# Altium PCB SHDN-IMD-S00-V00-IMDDaughter.PcbDoc
Units mm, origin at the board's own origin, x right, y up, seen from the top; angles counter-clockwise.
Board outline 55.68 x 59.75 mm, 2 copper layers (Top Layer, Bottom Layer); 75 components, 43 nets, 244 pads, 28 vias.
Unrouted connection lines stored in the file: 2.
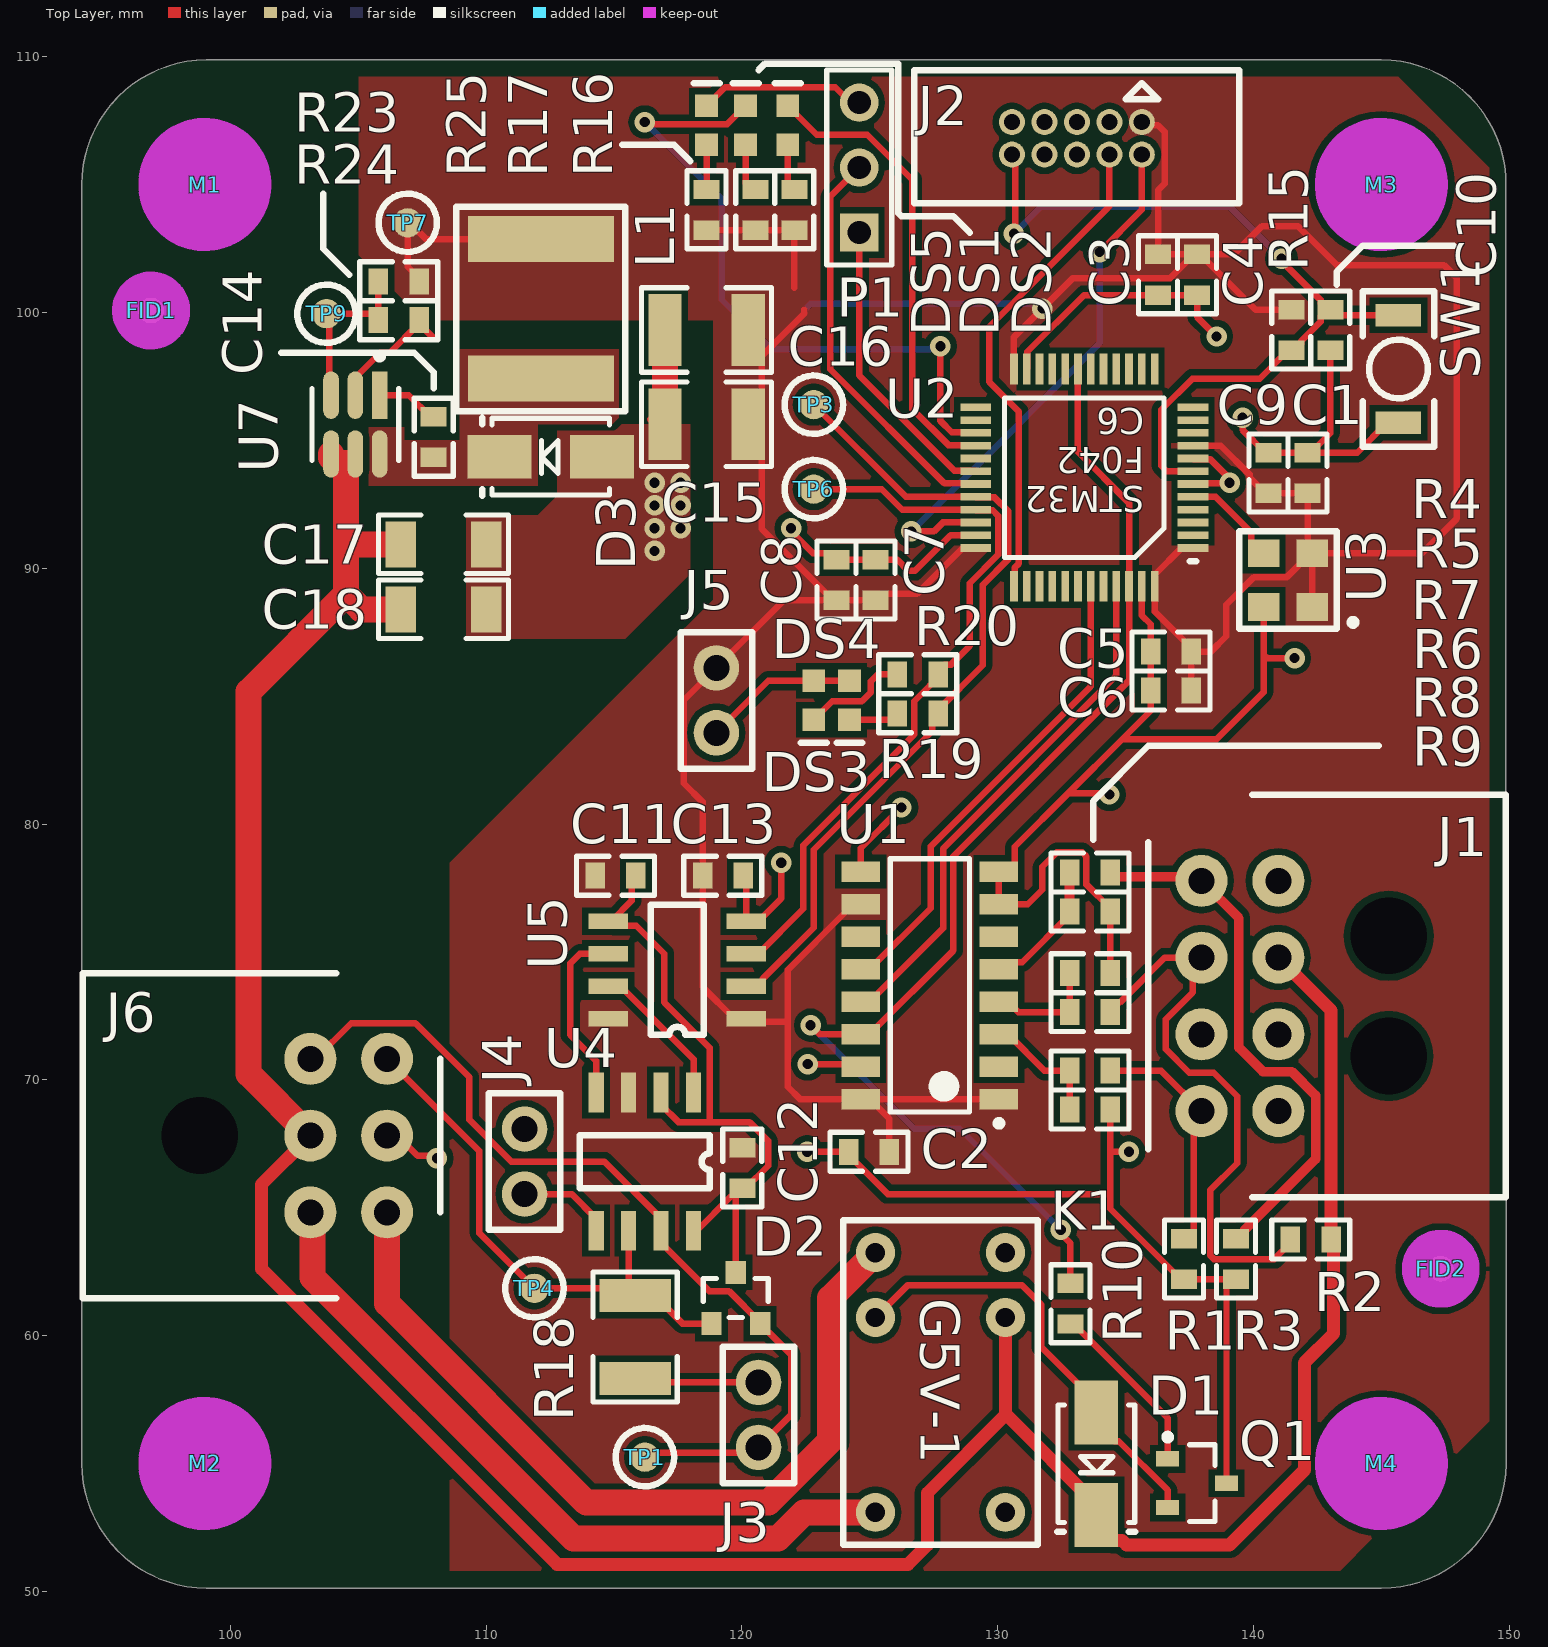
[diagram p0: Top Layer view]
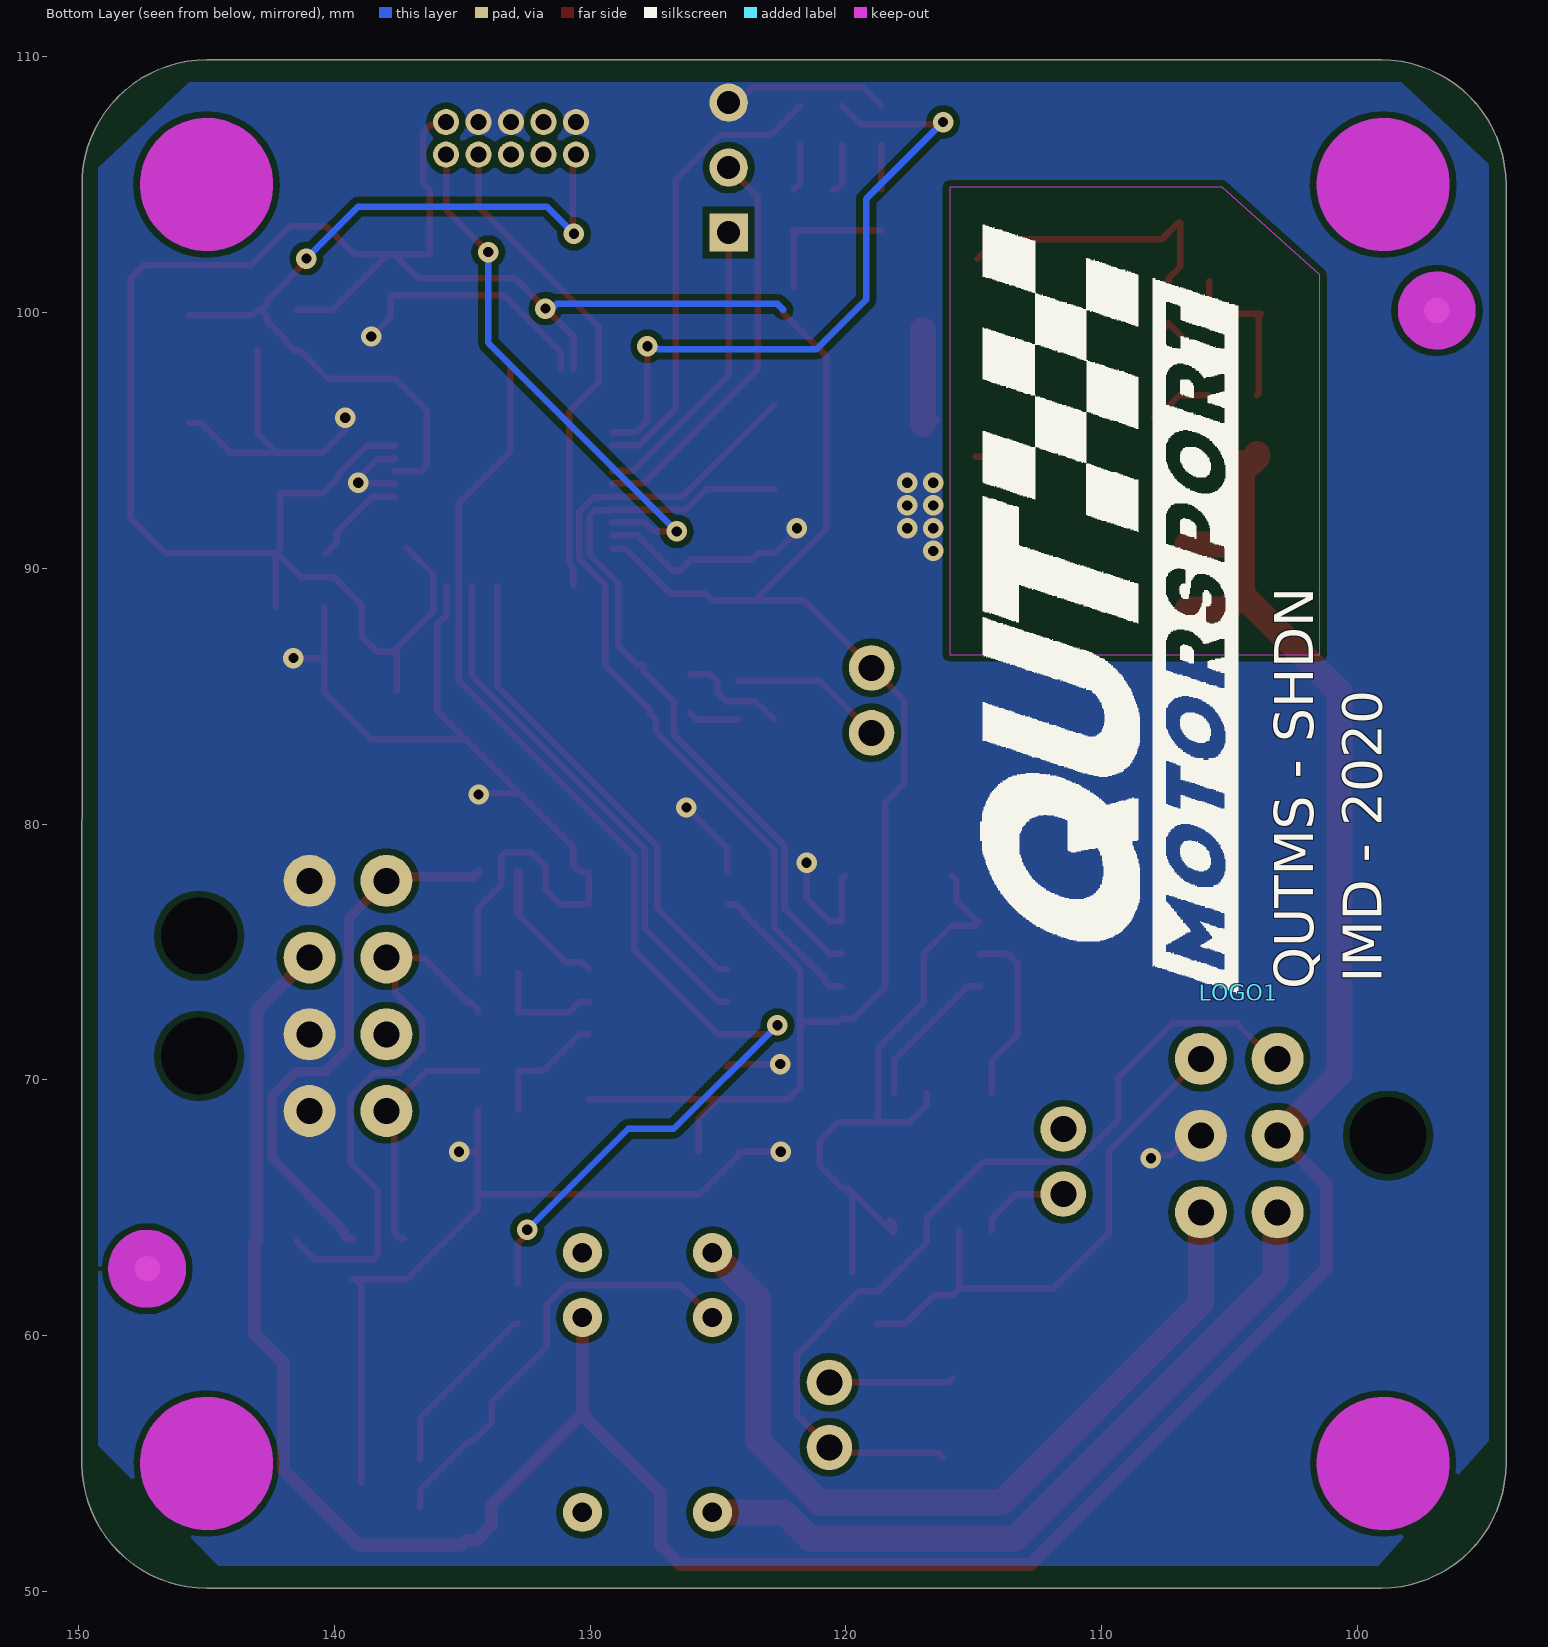
[diagram p1: Bottom Layer view, seen from below]
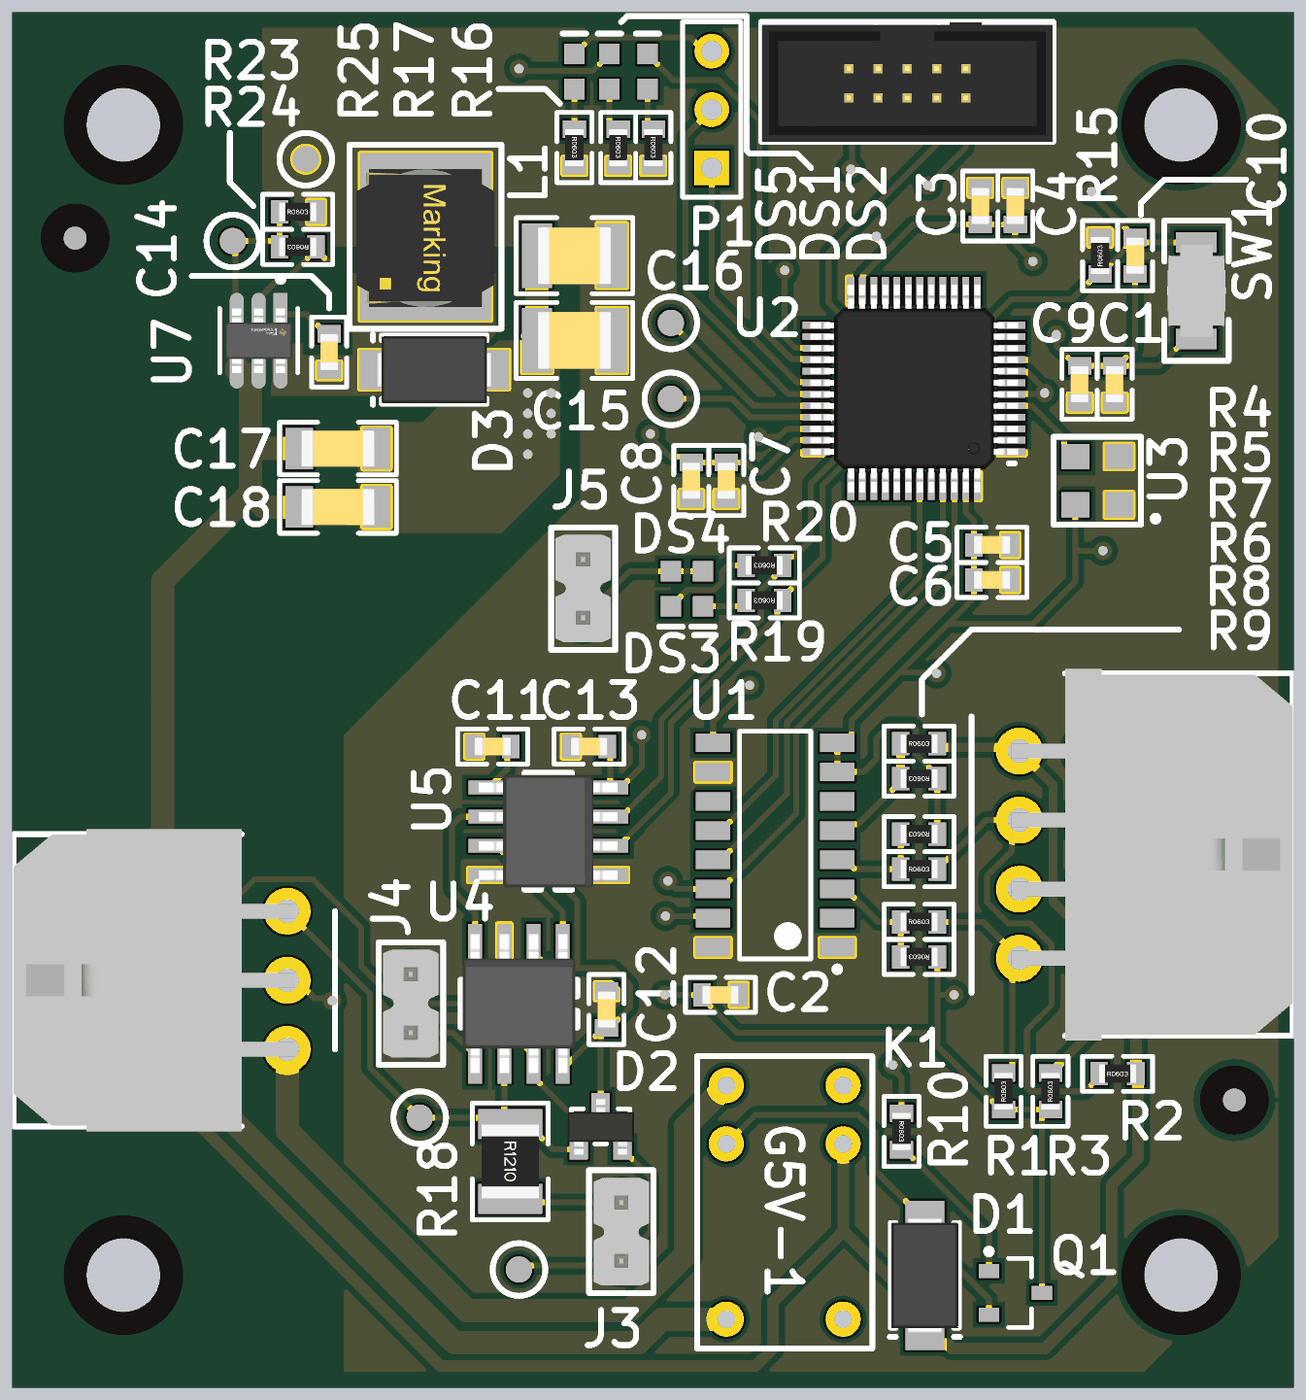
[diagram p2: 3D render of the assembled board from above, using the file's embedded part models]

## Layer stack, top to bottom
Top Solder: solder mask 0.0102, Solder Resist, Dk 3.5
Top Layer: signal copper 0.0356
Dielectric 1: dielectric 0.32, FR-4, Dk 4.8
Bottom Layer: signal copper 0.0356
Bottom Solder: solder mask 0.0102, Solder Resist, Dk 3.5

## Board outline
99.06,50.127 99.062,50.127 ccw(c99.069,55) 99.069,50.127 99.062,50.127 cw(c99.069,55) 94.196,55 94.196,105 cw(c99.069,105) 99.06,109.873 cw(c99.069,105) 99.069,109.873 ccw(c99.069,110) 99.07,109.873 145,109.873 ccw(c145,110) 145,109.873 cw(c145,105) 149.86,105.354 149.873,54.971 cw(c145,55) 145.001,50.127 cw(c145,55) 145,50.127 145.001,50.127

## Design rules (kind name [scope] priority, off if disabled: settings)
Clearance [All] p1: gap=0.254 ignorepadtopadclearanceinfootprint=FALSE except(0: Arc-Hole Track-Hole SMDPad-Hole THPad-Hole Via-Hole Fill-Hole Poly-Hole Region-Hole Text-Hole; 0.152: Arc-Arc Arc-Track Arc-SMDPad Track-Track Track-SMDPad SMDPad-SMDPad)
PolygonConnect [All] p1: connectstyle=Direct reliefconductorwidth=0.254 reliefentries=4 polygonreliefangle="90 Angle" airgapwidth=0.254
RoutingVias [All] p1: holewidth=0.4 width=0.8 viastyle="Through Hole" minholewidth=0.4 minwidth=0.8 maxholewidth=0.4 maxwidth=0.8
SolderMaskExpansion [All] p1: expansion=0.102 istentingtop=FALSE
Width [All] p1: maxlimit=1.016 minlimit=0.254 preferedwidth=0.508 minimp=50.000000 maximp=50.000000 favimp=50.000000
30 further rules are at their usual default settings.

## Classes and differential pairs
component class SHUTDOWN: D1 K1 Q1 R10
component class SHDN-IMD-S01-V00-IMDDaughter: FID1 FID2 J6 LOGO1 M1 M2 M3 M4
component class "POWER SUPPLY": C14 C15 C16 C17 D3 DS5 L1 R23 R24 R25 TP7 TP9 U7
component class MICROCONTROLLER: C3 C4 C5 C6 C7 C8 C9 C10 DS1 DS2 J2 P1 R15 R16 R17 SW1 U2 U3
component class IMD: C1 C2 J1 R1 R2 R3 R4 R5 R6 R7 R8 R9 U1
component class CANBUS: C11 C12 C13 D2 DS3 DS4 J3 J4 J5 R18 R19 R20 TP1 TP3 TP4 TP6 U4 U5

## Components (designator, comment, footprint, x,y, rotation, side; value= is the part's Value field where it differs from the comment)
C1 "100nF" Cap_Ceramic_0603 142.113,93.726 r270 top
C2 "100nF" Cap_Ceramic_0603 124.968,67.183 r0 top
C3 "100nF" Cap_Ceramic_0603 136.271,101.473 r90 top
C4 "4u7" Cap_Ceramic_0603 137.795,101.473 r90 top
C5 "100nF" Cap_Ceramic_0603 136.779,86.741 r0 top
C6 "4u7" Cap_Ceramic_0603 136.779,85.217 r0 top
C7 "100nF" Cap_Ceramic_0603 125.222,89.535 r270 top
C8 "4u7" Cap_Ceramic_0603 123.698,89.535 r270 top
C9 "100nF" Cap_Ceramic_0603 140.589,93.726 r270 top
C10 "100nF" Cap_Ceramic_0603 143.002,99.314 r90 top
C11 "100nF" Cap_Ceramic_0603 115.062,77.978 r0 top
C12 "100nF" Cap_Ceramic_0603 120.015,66.548 r90 top
C13 "100nF" Cap_Ceramic_0603 119.253,77.978 r180 top
C14 "100nF 100V 5% X7R 0603" Cap_Ceramic_0603 107.95,95.123 r270 top
C15 "47uF 16V 1210" Cap_Ceramic_1210 118.618,95.631 r0 top
C16 "47uF 16V 1210" Cap_Ceramic_1210 118.618,99.314 r0 top
C17 "22uF 35V 1206" Cap_Ceramic_1206 108.331,90.932 r180 top
C18 "22uF 35V 1206" Cap_Ceramic_1206 108.331,88.392 r180 top
D1 "1N4448WQ-7-F" SMA 133.858,54.991 r270 top
D2 "NUP2105L" NUP2105L 119.761,61.468 r0 top
D3 "B260A-13-F" SMA 112.522,94.361 r180 top
DS1 "LED Orange" "LED ORANGE 0603" 120.142,107.315 r90 top
DS2 "LED Orange" "LED ORANGE 0603" 121.793,107.315 r90 top
DS3 "LED Blue 0603" "LED BLUE 0603" 124.206,84.836 r270 top
DS4 "LED Blue 0603" "LED BLUE 0603" 122.809,84.836 r270 top
DS5 "LED Green 0603" "LED GREEN 0603" 118.618,107.315 r90 top
FID1 "Fiducial 1MM" "FIDUCIAL 1MM" 96.901,100.076 r0 top
FID2 "Fiducial 1MM" "FIDUCIAL 1MM" 147.32,62.611 r90 top
J1 "Microfit 3.0 2x4" Microfit_2X4_R_TH 145.288,73.279 r90 top
J2 "IDC 10P 2x5 1.27mm" "IDC 1.27MM 10P" 133.096,106.807 r180 top
J3 "Jumper 2Way Pins" Jumper_2Way_Pin 120.65,58.166 r90 top
J4 "Jumper 2Way Pins" Jumper_2Way_Pin 111.506,65.532 r270 top
J5 "Jumper 2Way Pins" Jumper_2Way_Pin 118.999,83.566 r270 top
J6 "Microfit 3.0 2x3" Microfit_2X3_R_TH 98.806,67.818 r270 top
K1 "G5V-1-DC12" G5V-1 127.762,58.166 r270 top
L1 "74404064221" Inductor_6x6mm 112.141,100.076 r90 top
LOGO1 "30mm Wide QUTMS Logo" "QUTMS LOGO 30MM" 104.648,73.406 r90 bottom
M1 "Hole M3 Tight Unplated" "M3.2 UNPLATED" 99,105 r0 top
M2 "Hole M3 Tight Unplated" "M3.2 UNPLATED" 99,55 r0 top
M3 "Hole M3 Tight Unplated" "M3.2 UNPLATED" 145,105 r0 top
M4 "Hole M3 Tight Unplated" "M3.2 UNPLATED" 145,55 r0 top
P1 "UART" HDR1X3 124.587,103.124 r90 top
Q1 "" PMV15UNEAR 137.795,54.229 r0 top
R1 "2k2" Res_ThinFilm_0603 137.287,62.992 r90 top
R2 "2k2" Res_ThinFilm_0603 142.24,63.754 r0 top
R3 "2k2" Res_ThinFilm_0603 139.319,62.992 r90 top
R4 "10k" Res_ThinFilm_0603 133.604,78.105 r0 top
R5 "3k9" Res_ThinFilm_0603 133.604,76.581 r180 top
R6 "10k" Res_ThinFilm_0603 133.604,72.644 r0 top
R7 "3k9" Res_ThinFilm_0603 133.604,74.168 r180 top
R8 "10k" Res_ThinFilm_0603 133.604,70.358 r0 top
R9 "3k9" Res_ThinFilm_0603 133.604,68.834 r180 top
R10 "1K" Res_ThinFilm_0603 132.842,61.245 r270 top
R15 "4k7" Res_ThinFilm_0603 141.478,99.314 r90 top
R16 "330R" Res_ThinFilm_0603 120.523,104.013 r270 top
R17 "330R" Res_ThinFilm_0603 122.047,104.013 r270 top
R18 "120R 1% 1210" Res_ThinFilm_1210 115.824,59.944 r270 top
R19 "330R" Res_ThinFilm_0603 126.873,84.328 r180 top
R20 "330R" Res_ThinFilm_0603 126.873,85.852 r180 top
R23 "64k9 1%" Res_ThinFilm_0603 106.584,101.219 r0 top
R24 "19k6 1%" Res_ThinFilm_0603 106.584,99.695 r180 top
R25 "1k 5% 0603" Res_ThinFilm_0603 118.618,104.013 r270 top
SW1 "B3U-1000P" "BTN B3U-1000P" 145.669,97.79 r90 top
TP1 "TestPoint_SMD" TestPointSMD 116.205,55.245 r90 top
TP3 "TestPoint_SMD" TestPointSMD 122.809,96.393 r90 top
TP4 "TestPoint_SMD" TestPointSMD 111.887,61.849 r90 top
TP6 "TestPoint_SMD" TestPointSMD 122.809,93.091 r90 top
TP7 "TestPoint_SMD" TestPointSMD 106.934,103.505 r90 top
TP9 "TestPoint_SMD" TestPointSMD 103.759,99.949 r90 top
U1 "SI8640BB-B-IS1R" SI8640BB-B-IS1R 127.348,73.691 r180 top
U2 "STM32F042C6" STM32F042C6 137.636,90.79 r180 top
U3 "DSC1001DI1-008.0000T" DSC1001DI1-008.0000TCT-ND 141.351,89.535 r180 top
U4 "SN65HVD233" SN65HVD233DR 116.205,66.802 r270 top
U5 "Si8621BC-B-IS" Si8621BC-B-IS 117.475,74.295 r180 top
U7 "LMR14010" LMR14010 104.902,95.631 r270 top

## Footprints (in the part's own frame and the unit in brackets; to place one, negate y for a bottom-side part, rotate by r counter-clockwise, add the part's x,y. Pads: shape width x height; smd on the part's side, far side on the other; paste and mask are expansions set on the pad)
"BTN B3U-1000P" [mil] "OMRON B3U-1000P"
  rect 35x70 smd: 1(-82.68,0) 2(82.68,0)
  silkscreen extent -120,-55 120,55, body extent -79,-49 79,49, height 63
Cap_Ceramic_0603 [mil]
  rect 30x40 smd: 1(-31.24,0) 2(31.24,0)
  silkscreen extent -60,-30 60,30, body extent -31,-16 32,16, height 33
Cap_Ceramic_1206 [mil]
  rect 47x71 smd: 1(-66.08,0) 2(66.08,0)
  silkscreen extent -100,-45 100,45, body extent -63,-31 63,32, height 53
Cap_Ceramic_1210 [mm]
  rect 1.3x2.8 smd: 1(-1.625,0) 2(1.625,0)
  silkscreen extent -2.54,-1.65 2.54,1.65, body extent -1.6,-1.25 1.6,1.25, height 1.35
DSC1001DI1-008.0000TCT-ND [mm]
  rect 1.219x1.092 smd: 1(-0.95,1.05) 2(0.95,1.05) 3(0.95,-1.05) 4(-0.95,-1.05)
  silkscreen extent -2.67,-1.91 1.91,1.91, body extent -1.25,-1.6 1.25,1.6, height 0.85
"FIDUCIAL 1MM" [mm]
  round 1 smd mask+1: 1(0,0)
  round 1 smd far side mask+1: 1(0,0)
  Keep-Out Layer circle w1.524: c0,0 r0.762
G5V-1 [mil]
  round 60 hole 30: 1(-200,100) 2(-100,100) 5(200,100) 6(200,-100) 9(-100,-100) 10(-200,-100)
  silkscreen extent -250,-150 250,150, body extent -242,-148 250,148, height 394
HDR1X3 [mm] "Connector; Header; 3 Position"
  rect 1.5x1.5 hole 0.9: 1(0,0)
  round 1.5 hole 0.9: 2(2.54,0) 3(5.08,0)
  silkscreen extent -1.27,-1.27 6.35,1.27
"IDC 1.27MM 10P" [mil]
  round 40 hole 25: 1(-100,-25) 2(-100,25) 3(-50,-25) 4(-50,25) 5(0,-25) 6(0,25) 7(50,-25) 8(50,25) 9(100,-25) 10(100,25)
  silkscreen extent -250,-105 250,100, body extent -249,-104 249,100, height 214
Inductor_6x6mm [mm]
  rect 1.8x5.7 smd: 1(-2.667,0) 2(2.794,0)
  silkscreen extent -3.94,-3.3 4.06,3.3, body extent -3,-3 3,3, height 4.56
Jumper_2Way_Pin [mil]
  round 70 hole 40: 1(-100,0) 2(0,0)
  silkscreen extent -155,-55 55,55, body extent -142,-48 42,47, height 332
"LED BLUE 0603" [mil]
  rect 35x35 smd: 1(-30,0) 2(30,0)
  silkscreen extent 65,-20 65,20, body extent -40,-20 40,20, height 30
"LED GREEN 0603" [mil]
  rect 35x35 smd: 1(-30,0) 2(30,0)
  silkscreen extent 65,-20 65,20, body extent -40,-20 40,20, height 30
"LED ORANGE 0603" [mil]
  rect 35x35 smd: 1(-30,0) 2(30,0)
  silkscreen extent 65,-20 65,20, body extent -40,-20 40,20, height 30
LMR14010 [mm]
  rect 1.854x0.612 smd paste+0 mask+0: 1(-1.136,0.933)
  rrect100% 1.854x0.612 smd paste+0 mask+0: 2(-1.136,-0.017) 3(-1.136,-0.967) 4(1.164,-0.967) 5(1.164,-0.017) 6(1.164,0.933)
  silkscreen extent -2.79,-1.72 1.41,1.68, body extent -2.56,-1.97 2.59,1.93, height 0.25
"M3.2 UNPLATED" [mm]
  round 0 hole 3.2 unplated mask+2.6: 1(0,0)
  Keep-Out Layer circle w2.667: c0,0 r1.27
Microfit_2X3_R_TH [mil]
  round 80 hole 40: 1(118.11,170) 2(0,170) 3(-118.11,170) 4(118.11,288.19) 5(0,288.19) 6(-118.11,288.19)
  round 0 hole 118.11 mask+10: NC(0,0)
  silkscreen extent -250,-180 250,370, body extent -259,-180 259,302, height 350
Microfit_2X4_R_TH [mil]
  round 80 hole 40: 1(177.17,170) 2(59.06,170) 3(-59.06,170) 4(-177.17,170) 5(177.17,288.19) 6(59.06,288.19) 7(-59.06,288.19) 8(-177.17,288.19)
  round 0 hole 118.11 mask+10: NC(-92.52,0) NC(92.52,0)
  silkscreen extent -310,-180 310,370, body extent -318,-180 318,302, height 350
NUP2105L [mm]
  rect 0.8x0.9 smd: 1(-0.95,-1) 2(0.95,-1) 3(0,1)
  silkscreen extent -1.27,-0.76 1.27,0.76, body extent -1.45,-1.22 1.45,1.18, height 1
PMV15UNEAR [mm] "SOT23, 3-Leads, Body 2.90x2.30mm, Pitch 0.95mm, IPC Medium Density"
  rect 0.9x0.6 smd: D(1.15,0) G(-1.15,0.95) S(-1.15,-0.95)
  silkscreen extent -1.27,-1.5 0.7,1.92, body extent -0.7,-1.5 0.7,1.5, height 1.1
"QUTMS LOGO 30MM" [mm]
  silkscreen extent -0.03,0.03 30.02,10.1
Res_ThinFilm_0603 [mil]
  rect 30x40 smd: 1(-31.24,0) 2(31.24,0)
  silkscreen extent -60,-30 60,30, body extent -31,-16 32,16, height 18
Res_ThinFilm_1210 [mm]
  rect 1.3x2.8 smd: 1(-1.625,0) 2(1.625,0)
  silkscreen extent -2.54,-1.65 2.54,1.65, body extent -1.6,-1.25 1.6,1.25, height 0.6
Si8621BC-B-IS [mm]
  rect 1.55x0.6 smd: 1(-2.7,1.905) 2(-2.7,0.635) 3(-2.7,-0.635) 4(-2.7,-1.905) 5(2.7,-1.905) 6(2.7,-0.635) 7(2.7,0.635) 8(2.7,1.905)
  silkscreen extent -1.04,-2.54 1.04,2.54, body extent -3.01,-2.45 3.01,2.45, height 1.63
SI8640BB-B-IS1R [mm] "SOIC, 16-Leads, Body 9.90x3.90mm, Pitch 1.27mm, IPC Medium Density"
  rect 1.5x0.8 smd: 1(-2.7,4.445) 2(-2.7,3.175) 3(-2.7,1.905) 4(-2.7,0.635) 5(-2.7,-0.635) 6(-2.7,-1.905) 7(-2.7,-3.175) 8(-2.7,-4.445) 9(2.7,-4.445) 10(2.7,-3.175) 11(2.7,-1.905) 12(2.7,-0.635) 13(2.7,0.635) 14(2.7,1.905) 15(2.7,3.175) 16(2.7,4.445)
  silkscreen extent -2.83,-4.95 1.55,5.52, body extent -1.95,-4.95 1.95,4.95, height 1.75
SMA [mm]
  rect 2.5x1.7 smd: A(-2,0) K(2,0)
  silkscreen extent -2.3,-1.52 2.67,1.52, body extent -2.52,-1.46 2.52,1.46, height 2.4
SN65HVD233DR [mm]
  rect 1.55x0.6 smd: 1(-2.7,1.903) 2(-2.7,0.633) 3(-2.7,-0.637) 4(-2.7,-1.907) 5(2.7,-1.907) 6(2.7,-0.637) 7(2.7,0.633) 8(2.7,1.903)
  silkscreen extent -1.04,-2.54 1.04,2.54, body extent -3.01,-2.45 3.01,2.45, height 1.63
STM32F042C6 [mm]
  rect 1.2x0.3 smd: 1(0,0) 2(0,-0.5) 3(0,-1) 4(0,-1.5) 5(0,-2) 6(0,-2.5) 7(0,-3) 8(0,-3.5) 9(0,-4) 10(0,-4.5) 11(0,-5) 12(0,-5.5) 25(8.5,-5.5) 26(8.5,-5) 27(8.5,-4.5) 28(8.5,-4) 29(8.5,-3.5) 30(8.5,-3) 31(8.5,-2.5) 32(8.5,-2) 33(8.5,-1.5) 34(8.5,-1) 35(8.5,-0.5) 36(8.5,0)
  rect 0.3x1.2 smd: 13(1.5,-7) 14(2,-7) 15(2.5,-7) 16(3,-7) 17(3.5,-7) 18(4,-7) 19(4.5,-7) 20(5,-7) 21(5.5,-7) 22(6,-7) 23(6.5,-7) 24(7,-7) 37(7,1.5) 38(6.5,1.5) 39(6,1.5) 40(5.5,1.5) 41(5,1.5) 42(4.5,1.5) 43(4,1.5) 44(3.5,1.5) 45(3,1.5) 46(2.5,1.5) 47(2,1.5) 48(1.5,1.5)
  silkscreen extent -0.13,-5.86 7.36,0.51, body extent -0.27,-7.26 8.76,1.77, height 1.5
TestPointSMD [mil]
  round 45 smd: 1(0,0)
  silkscreen extent -45,-45 45,45

## Part data
C1 C2 C9 C10: library part "100nF 50V 5% X7R 0603", "Capacitor, Ceramic, SMD, 100nF, 50V, 5%, X7R, 0603"
C3 C5 C7 C11 C12 C13: library part "100nF 100V 5% X7R 0603", "Capacitor, Ceramic, SMD, 100nF, 100V, 5%, X7R, 0603"
C4 C6 C8: library part "4u7 50V 5% X7R 0603", "Capacitor, Ceramic, SMD, 4u7, 50V, 5%, X7R, 0603"
C14: "Capacitor, Ceramic, SMD, 100nF, 100V, 5%, X7R, 0603"
C15 C16: library part "47uF 16V 10% X7R 1210", "Capacitor, Ceramic, SMD, 47uF, 16V, 5%, X7R, 1210"
C17 C18: library part "22uF 35V 10% X7R 1206", "Capacitor, Ceramic, SMD, 22uF, 35V, 10%, X7R, 1206"
D1: "Diode, SMD, 75V, 5%, 250mA, SOD123", Average Rectified Current=150mA, Forward Voltage=1V, Manufacturer="ON Semiconductor / Fairchild", Manufacturer Part Number=1N914BWS, Max Forward Surge Current (Ifsm)=4A, Max Operating Temperature=150°C, Max Repetitive Reverse Voltage (Vrrm)=75V, Max Reverse Leakage Current=5uA, Min Operating Temperature=-55°C, Package Quantity=1, Power Dissipation=200mW, Category="Rectifier Diodes", Contact Plating=Tin,Matte, Element Configuration=Single, Forward Current=150mA, Height=1mm, Lead Free="Lead Free", Length=1.8mm, Max Reverse Voltage (DC)=75V, Mount="Surface Mount", Number of Pins=2, Packaging="Tape and Reel", Peak Reverse Current=5uA, Radiation Hardening=No, REACH SVHC="No SVHC", Recovery Time=4ns, Reverse Recovery Time=4ns, Reverse Voltage=75V, Weight=0.0276g, Width=1.35mm
D3: "Diode, Schottky Barrier Rectifier, 60 V, 2 A, B260A-13-F"
DS1 DS2: library part "LED ORANGE 0603"
DS3 DS4: library part "LED BLUE 0603"
J1: library part Microfit_2x4
J3 J4 J5: library part "Jumper 2Way Side Pins", "Jumper 2Way Side Pins"
J6: library part Microfit_2x3
K1: "General Purpose Relay SPDT (1 Form C) Through Hole, 12V, 2A"
L1: "FIXED IND 220UH 660MA 850 MOHM", ComponentLink1Description=Digikey, ComponentLink1URL=https://www.digikey.com.au/product-detail/en/w%C3%BCrth-elektronik/74404064221/732-7261-1-ND/5353241, ComponentLink2Description="LCSC A", ComponentLink2URL=https://lcsc.com/product-detail/Power-Inductors_Sunlord-SWPA6045S221MT_C91047.html, ComponentLink3Description="LCSC B", ComponentLink3URL=https://lcsc.com/product-detail/Power-Inductors_SXN-Shun-Xiang-Nuo-Elec-SMNR6045-221MT_C467145.html
LOGO1: library part "QUTMS Logo 30mm"
M1 M2 M3 M4: "M3.2 Hole, No Plating"
P1: library part "Header 3", "Header, 3-Pin", LatestRevisionDate=17-Jul-2002, LatestRevisionNote="Re-released for DXP Platform.", Publisher="Altium Limited"
Q1: library part PMV15UNEAR, "MOSFET N-CH, 20V, SOT23", Manufacturer=Nexperia
R1 R2 R3: library part "2k2 5% 0603", "Resistor, SMD, 2k2, 0.1W, 5%, 0603"
R4 R6 R8: library part "10k 1% 0603", "Resistor, SMD, 10k, 0.1W, 1%, 0603"
R5 R7 R9: library part "3k9 5% 0603", "Resistor, SMD, 3k9, 0.1W, 5%, 0603"
R10: library part "1k 5% 0603", "Resistor, SMD, 1k, 0.1W, 5%, 0603"
R15: library part "4k7 5% 0603", "Resistor, SMD, 4k7, 0.1W, 5%, 0603"
R16 R17 R19 R20: library part "330R 5% 0603", "Resistor, SMD, 330R, 0.1W, 5%, 0603"
R18: "Resistor, SMD, 120R, 0.25W, 1%, 1210"
R23: library part "64k9 1% 0603", "Resistor, SMD, 64k9, 0.1W, 5%, 0603"
R24: library part "19k6 1% 0603", "Resistor, SMD, 19k6, 0.1W, 5%, 0603"
R25: "Resistor, SMD, 1k, 0.1W, 5%, 0603"
SW1: library part "BTN B3U-1000P", "Omron B3U-1000P Ultra Miniture Switch", ComponentLink1Description=LCSC, ComponentLink1URL=https://lcsc.com/product-detail/Tactile-Switches_BRIGHT-TSA063G50-250_C294565.html
U2: library part STM32042C6, "ARM® Cortex®-M0 STM32F0 Microcontroller IC 32-Bit 48MHz 32KB (32K x 8) FLASH 48-LQFP (7x7)", ComponentLink1Description=Digikey, ComponentLink1URL=https://www.digikey.com.au/product-detail/en/stmicroelectronics/STM32F042C6T6TR/497-19319-1-ND/10063344, ComponentLink2Description=Datasheet, ComponentLink2URL=https://www.st.com/resource/en/datasheet/stm32f042k6.pdf
U3: "on 8MHz XO (Standard) CMOS Oscillator 1.8 ~ 3.3V Standby (Power Down) 4-SMD, No Lead"
D2: ComponentLink1Description=Datasheet, ComponentLink1URL=https://www.onsemi.cn/PowerSolutions/document/NUP2105L-D.PDF, ComponentLink2Description=LCSC, ComponentLink2URL=https://lcsc.com/product-detail/TVS_ON-Semiconductor-NUP2105LT1G_C14486.html, ComponentLink3Description=Digikey, ComponentLink3URL=https://www.digikey.com.au/product-detail/en/on-semiconductor/SZNUP2105LT1G/SZNUP2105LT1GOSCT-ND/3487669
U1 U5: ComponentLink1Description=Digikey, ComponentLink1URL=https://www.digikey.com.au/product-detail/en/silicon-labs/SI8621BC-B-ISR/336-4774-1-ND/8611005, ComponentLink2Description=Datasheet, ComponentLink2URL=https://www.silabs.com/documents/public/data-sheets/si861x-2x-datasheet.pdf
U4: ComponentLink1Description=LCSC, ComponentLink1URL=https://lcsc.com/product-detail/CAN-ICs_Texas-Instruments_SN65HVD233DRG4_Texas-Instruments-Texas-Instruments-SN65HVD233DRG4_C61643.html, ComponentLink2Description=Digikey, ComponentLink2URL=https://www.digikey.com.au/product-detail/en/texas-instruments/SN65HVD233DR/296-35967-1-ND/4134960, ComponentLink3Description=Datasheet, ComponentLink3URL=https://www.ti.com/lit/ds/symlink/sn65hvd233.pdf?ts=1588560888178, ComponentLink4Description="Ti Product Page", ComponentLink4URL=https://www.ti.com/product/SN65HVD233

## Via types
v1: diameter 0.8, hole 0.4, Top Layer to Bottom Layer, tented both sides, 28 vias

## Nets (pads, with @x,y where several pads share a name; then routed paths per layer and width w, separated by ;. In a path a pad name is that pad's centre, name@x,y a point inside that pad or via, vN(x,y) a via of type N, cw(c..) or ccw(c..) an arc to the next point about the centre after c; other vN are vias at no path point)
3V3: C1.2 C2.2 C3.2 C4.2 C5.2 C6.2 C7.2 C8.2 C9.2 C11.1 C12.2 C13.2 C15.2 C16.2 J2.1 J5.1 L1.2 R15.2 R16.2 R17.2 R23.2 R25.2 TP7.1 U1.1 U1.10 U1.16 U2.1 U2.9 U2.24 U2.36 U2.48 U3.1 U3.4 U4.3 U5.1 U5.8 | length 160.1
  Top Layer w0.254: R23.2 107.378,101.346 106.934,101.79 TP7.1 107.011,103.505 107.646,102.87 L1.2 114.091,102.87 L1.2@114.864,102.097 ; R25.2 R16.2 R17.2 122.047,100.965 ; 122.444,100.099 122.444,99.966 120.777,98.299 120.777,91.536 C8.2@123.571,88.742 ; U1.10 124.298,76.866 124.025,76.593 124.025,76.527 121.793,74.295 121.793,72.265 ; C2.2 125.761,68.483 U1.16@124.998,69.246 ; U2.36 129.113,90.767 128.613,90.767 126.842,88.996 125.476,88.996 C7.2 C8.2 C8.2@123.571,88.742 ; U1.1 U1.16@124.998,69.246 ; U2.24 130.636,99.04 v1(131.749,100.153) 132.942,101.346 136.748,101.346 C4.2@137.668,102.266 ; J2.1 135.757,107.321 136.265,107.321 136.525,107.061 136.525,105.033 136.271,104.779 C3.2 C4.2@137.668,102.266 ; U2.1@137.186,90.79 136.136,89.74 U2.48 136.136,88.304 137.572,86.868 C5.2 ; C6.2 C5.2 ; U2.9 138.724,94.79 139.846,93.668 139.846,93.549 140.462,92.933 C1.2 142.113,90.773 U3.4 ; R15.2 140.081,100.107 C4.2@137.922,102.266 ; U3.1 U3.4 ; 121.793,72.265 121.793,69.723 122.27,69.246 U1.16@124.998,69.246 ; 121.793,72.265 120.299,72.265 U5.1 119.7,72.39 118.46,73.63 C13.2 118.46,80.86 117.729,81.591 117.729,84.836 J5.1 121.635,88.742 C8.2@123.571,88.742 ; C5.2 138.334,86.741 138.938,87.345 138.938,88.573 140.022,89.656 141.309,89.656 142.238,90.585 U3.4 ; C4.2@137.668,102.266 C4.2 C4.2@137.922,102.266 ; C4.2@137.922,102.266 139.223,102.266 140.335,103.378 141.732,103.378 143.256,101.854 147.447,101.854 147.955,101.346 147.955,91.948 146.592,90.585 U3.4
  Bottom Layer w0.254: 122.444,100.099 122.675,100.33 131.318,100.33 131.517,100.131 131.727,100.131 v1(131.749,100.153)
+12: C17.2 C18.2 D1.K J1.2 J6.2 K1.2 R2.2 U7.4 U7.5 | length 119.3
  Top Layer w0.254: D1.K@133.858,52.666 D1.K@134.529,51.995
  Top Layer w0.508: J6.2 101.219,65.913 101.219,62.611 112.776,51.054 126.492,51.054 127.254,51.816 127.254,53.848 130.327,56.921 ; K1.2 130.302,56.947 130.327,56.921 ; J1.2 143.033,72.715 R2.2 143.129,63.658 143.129,60.071 141.99,58.932 141.99,54.737 139.069,51.816 135.033,51.816 134.854,51.995 134.529,51.995 134.454,51.995 133.858,52.591 133.858,52.666 D1.K 133.858,53.391 130.327,56.921
  Top Layer w1.016: J6.2 100.711,70.231 100.711,85.177 104.521,88.987 ; U7.4 103.935,94.323 104.137,94.121 104.521,94.121 104.521,90.932 ; C18.2 105.116,88.392 104.521,88.987 ; C17.2 104.521,90.932 ; 104.521,88.987 104.521,90.932
"CAN H": D2.2 J3.1 J6.3 TP1.1 U4.7 | length 34.9
  Top Layer w0.254: J6.3@103.33,70.818 104.727,72.215 107.236,72.215 109.347,70.104 109.347,68.435 110.98,66.802 114.613,66.802 116.838,64.577 U4.7 116.838,63.627 118.726,61.739 119.49,61.739 120.711,60.518 D2.2 121.92,59.259 121.92,56.896 J3.1 120.439,55.415 116.375,55.415 TP1.1
"CAN L": D2.1 J6.6 R18.1 TP4.1 U4.6 | length 21.1
  Top Layer w0.254: J6.6 109.728,67.216 109.728,64.008 TP4.1 115.544,61.849 R18.1@115.568,61.825 ; U4.6 R18.1@115.568,61.825 ; D2.1 117.675,60.468 116.574,61.569 R18.1 R18.1@115.568,61.825
"CAN LBK": J4.2 U4.5 | length 3.7
  Top Layer w0.254: J4.2 113.343,65.532 114.298,64.577 U4.5
"CAN LED": DS3.1 DS4.1 J5.2 | length 6
  Top Layer w0.254: J5.2 121.031,85.598 DS4.1 DS3.1
"CAN RX": R20.1 TP6.1 U2.33 U5.3 | length 29.3
  Top Layer w0.254: U5.3 120.65,74.93 122.403,76.683 122.403,79.162 126.74,83.5 126.74,84.799 127.92,85.979 127.92,86.233 128.174,86.233 128.905,86.964 128.905,89.414 130.015,90.524 130.015,92.056 129.804,92.267 129.159,92.267 U2.33 126.268,92.29 125.467,93.091 TP6.1
"CAN RX LED": DS4.2 R20.2 | length 4.3
  Top Layer w0.254: DS4.2 123.533,84.798 124.69,84.798 125.042,85.15 125.042,85.576 125.318,85.852 R20.2
"CAN TX": R19.1 TP3.1 U2.32 U5.2 | length 32.4
  Top Layer w0.254: U5.2 120.65,73.66 120.823,73.833 120.823,73.96 122.809,75.946 122.809,78.994 127.445,83.63 127.445,84.106 R19.1 127.666,84.455 129.413,86.202 129.413,89.347 130.422,90.356 130.422,92.224 129.879,92.767 129.159,92.767 U2.32 126.412,92.79 TP3.1
"CAN TX LED": DS3.2 R19.2 | length 2
  Top Layer w0.254: DS3.2 125.826,84.074 R19.2
GND: C1.1 C2.1 C3.1 C4.1 C5.1 C6.1 C7.1 C8.1 C9.1 C10.1 C13.1 C15.1 C16.1 C17.1 C18.1 D3.A DS5.2 J1.1 J1.3 J1.4 J2.3 J2.5 J2.9 J6.5 P1.3 Q1.D R1.1 R3.1 R5.1 R7.1 R9.1 R24.1 SW1.1 U1.7 U1.8 U1.9 U1.15 U2.6 U2.8 U2.23 U2.35 U2.47 U3.2 U5.4 U7.2 | length 131
  Top Layer w0.254: U7.2 104.885,97.446 105.864,98.424 106.234,98.424 107.378,99.568 107.886,99.06 ; J6.5 106.533,67.818 107.317,67.033 107.973,67.033 v1(108.077,66.929) ; D3.A D3.A@114.922,94.361 ; C15.1@116.409,95.821 C15.1@116.599,95.631 ; v1@117.475,91.694 v1@117.475,91.808 ; DS5.2 119.342,108.801 123.653,108.801 124.25,108.204 P1.3 ; C13.1 120.175,77.85 U5.4 120.65,76.2 121.539,77.089 v1(121.539,78.486) ; v1(121.92,91.567) 121.92,91.44 122.778,90.582 123.444,90.582 C8.1 C7.1 126.08,90.328 126.514,89.894 126.759,89.894 128.155,91.29 U2.35 ; v1(122.555,67.183) C2.1 124.175,67.056 125.699,65.532 134.397,65.532 ; v1(122.574,70.612) 124.552,70.612 U1.15 ; U1.9 124.648,79.055 v1(126.238,80.645) ; U2.23 131.159,97.813 131.159,98.458 133.38,100.68 C3.1 C4.1 137.795,99.822 v1(138.557,99.06) ; v1(134.366,81.153) 134.308,81.211 132.773,81.211 ; R9.1 134.397,67.183 ; R7.1 R5.1 134.397,76.708 133.471,77.634 133.471,78.729 133.307,78.892 132.314,78.892 131.746,78.325 131.746,77.434 131.179,76.866 U1.7 U1.8 130.398,78.136 130.671,78.409 130.671,79.109 132.773,81.211 ; v1(135.128,67.183) 134.397,67.183 ; U2.47 135.636,88.156 135.986,87.806 C5.1 C6.1 135.986,84.424 134.874,83.312 ; U2.6 137.659,93.313 139.033,93.313 v1(139.065,93.345) 139.065,93.506 138.304,94.267 137.659,94.267 U2.8 ; Q1.D 138.945,61.945 R3.1@139.199,62.199 ; R3.1 R3.1@139.199,62.199 ; v1(139.573,95.885) 139.573,95.408 140.462,94.519 C9.1 C1.1 C1.1@142.24,94.519 ; U3.2 140.401,86.614 ; v1(141.605,86.487) 140.528,86.487 140.401,86.614 ; C10.1 143.002,95.281 C1.1@142.24,94.519 ; SW1.1 145.225,95.69 144.054,94.519 C1.1@142.24,94.519 ; 132.773,81.211 134.874,83.312 ; 134.397,65.532 134.397,67.183 ; 134.397,65.532 134.397,64.961 137.16,62.199 R1.1 R3.1@139.199,62.199 ; 134.874,83.312 138.557,83.312 140.401,85.156 140.401,86.614
  Top Layer w1.016: C15.1 C16.1
  other v1: 116.586,90.678 116.586,91.567 117.602,91.567 116.586,92.456 117.602,92.456 116.586,93.345 117.602,93.345
"IMD M": J1.5 R3.2 R4.2 | length 21.6
  Top Layer w0.381: R4.2 134.56,77.942 137.805,77.942 J1.5 139.428,76.318 139.428,71.255 140.365,70.318 141.496,70.318 142.43,69.384 142.43,66.897 139.636,64.103 139.636,63.976 139.446,63.785 R3.2
"IMD MEAS LOW": U1.13 U2.45 | length 20.6
  Top Layer w0.254: U1.13 124.998,73.056 127.864,75.922 127.864,79.029 134.636,85.801 U2.45
"IMD MEASUREMENT": U1.12 U2.43 | length 18.9
  Top Layer w0.254: U1.12 124.998,74.326 127.381,76.709 127.381,79.121 133.636,85.376 U2.43
"IMD ML": J1.6 R2.1 R6.2 | length 22.5
  Top Layer w0.254: R6.2 134.397,72.771 134.651,73.025 134.778,73.025 136.532,74.779 J1.6 137.628,74.439 137.628,73.414 136.571,72.357 136.571,71.2 137.492,70.279 138.443,70.279 139.365,69.357 139.365,66.74 138.303,65.678 138.303,63.141 138.452,62.992 140.812,62.992 141.447,63.627 R2.1
"IMD MLV": R6.1 R7.2 U1.4 | length 4.5
  Top Layer w0.254: U1.4 130.398,73.056 130.81,72.644 R6.1 R7.2
"IMD MV": R4.1 R5.2 U1.5 | length 5.3
  Top Layer w0.254: U1.5 130.321,74.599 130.956,74.599 132.811,76.454 R5.2
  Top Layer w0.381: R5.2 R4.1
"IMD S": J1.8 R1.2 R8.2 | length 9.6
  Top Layer w0.254: R8.2 136.389,70.358 J1.8 137.668,68.479 137.668,64.039 137.414,63.785 R1.2
"IMD STAT": R10.1 U1.14 U2.19 U2.46 | length 48.8
  Top Layer w0.254: v1(122.682,72.136) 123.032,71.786 U1.14 124.998,71.786 128.27,75.058 128.27,78.74 135.136,85.606 U2.46 135.136,92.552 133.136,94.552 U2.19 ; v1(132.461,64.135) 132.461,63.987 132.842,63.606 R10.1
  Bottom Layer w0.254: v1(122.682,72.136) 126.735,68.083 128.513,68.083 v1(132.461,64.135)
"IMD SV": R8.1 R9.2 U1.3 | length 4.9
  Top Layer w0.254: U1.3 130.398,71.786 131.826,70.358 R8.1 R9.2
"ISO 3V3": J4.1
"ISO CAN RX": U4.4 U5.6 | length 7.1
  Top Layer w0.254: U4.4 114.298,70.741 113.284,71.755 113.284,74.549 113.665,74.93 U5.6
"ISO CAN TX": U4.1 U5.7 | length 5.8
  Top Layer w0.254: U5.7 115.25,73.66 118.108,70.801 U4.1
"ISO GND": C11.2 C12.1 D2.3 U4.2 U4.8 U5.5 | length 26.4
  Top Layer w0.254: C11.2 115.697,77.82 115.697,77.008 114.889,76.2 U5.5 114.948,76.027 115.87,76.027 116.967,74.93 116.967,73.025 118.745,71.247 118.745,68.346 ; U4.2 116.838,69.027 117.519,68.346 118.745,68.346 ; U4.8 118.108,64.343 U4.8@118.281,64.516 ; U4.8@118.172,64.038 119.634,65.501 119.697,65.564 119.888,65.755 C12.1 ; D2.3 119.761,65.501 C12.1 ; 118.745,68.346 120.295,68.346 121.031,67.61 121.031,66.644 120.142,65.755 C12.1
LED0: DS1.2 U2.27 | length 26.4
  Top Layer w0.254: v1(116.205,107.442) 116.294,107.353 119.418,107.353 DS1.2 ; v1(127.762,98.679) 127.762,95.758 128.207,95.313 129.113,95.313 U2.27
  Bottom Layer w0.254: v1(116.205,107.442) 119.215,104.432 119.215,100.495 121.158,98.552 127.34,98.552 127.363,98.575 127.658,98.575 v1(127.762,98.679)
LED1: DS2.2 U2.28 | length 18.1
  Top Layer w0.254: DS2.2 122.924,106.946 124.904,106.946 126.662,105.188 126.662,96.223 128.072,94.813 129.113,94.813 U2.28
NetD1_A: D1.A K1.9 Q1.S | length 17.4
  Top Layer w0.254: K1.9 126.492,61.976 130.937,61.976 131.699,61.214 131.699,59.55 133.858,57.391 D1.A 133.858,56.591 134.581,55.868 134.737,55.868 136.645,53.96 Q1.S
NetDS1_1: DS1.1 R16.1 | length 2
  Top Layer w0.254: DS1.1 120.142,105.06 120.396,104.806 R16.1
NetDS2_1: DS2.1 R17.1 | length 1.9
  Top Layer w0.254: DS2.1 121.793,105.06 R17.1
NetDS5_1: DS5.1 R25.1 | length 1.7
  Top Layer w0.254: R25.1 DS5.1
NetJ3_2: J3.2 R18.2 | length 4.9
  Top Layer w0.254: R18.2 115.977,58.166 J3.2
NetQ1_G: Q1.G R10.2 | length 6.9
  Top Layer w0.254: R10.2 132.969,60.452 136.645,56.776 Q1.G
NRST: C10.2 J2.10 R15.1 SW1.2 U2.7 | length 32.3
  Top Layer w0.254: J2.10 130.683,106.045 130.683,103.124 v1(130.635,103.076) ; U2.7 136.61,93.79 136.398,94.002 136.398,96.197 137.612,97.411 140.242,97.411 141.351,98.521 141.605,98.521 141.859,98.775 141.859,98.878 142.621,99.64 142.621,99.853 C10.2@142.875,100.107 ; v1(141.097,102.108) 141.097,102.012 142.621,100.488 142.621,100.361 C10.2@142.875,100.107 ; SW1.2 143.219,99.89 C10.2 C10.2@142.875,100.107
  Bottom Layer w0.254: v1(130.635,103.076) 131.699,104.14 139.065,104.14 v1(141.097,102.108)
"OSC IN": U2.5 U3.3 | length 3.8
  Top Layer w0.254: U2.5 138.515,92.79 139.918,91.387 139.918,91.004 U3.3@140.337,90.585
"PWR CB": C14.1 U7.1 | length 2.5
  Top Layer w0.254: U7.1 106.972,96.767 107.823,95.916 C14.1
"PWR FB": R23.1 R24.2 TP9.1 U7.3 | length 6.9
  Top Layer w0.254: U7.3 103.867,96.836 103.867,99.841 TP9.1 105.537,99.949 R24.2 R23.1
"PWR SW": C14.2 D3.K L1.1 U7.6
"SHDN IN": J6.4 K1.10 | length 33.2
  Top Layer w1.016: J6.4 106.126,61.26 113.919,53.467 121.031,53.467 123.444,55.88 123.444,61.468 K1.10
"SHDN OUT": J6.1 K1.6 | length 29.2
  Top Layer w1.016: J6.1 103.203,64.739 103.203,62.278 113.411,52.07 121.413,52.07 122.429,53.086 K1.6
SWCLK: J2.4 U2.37 | length 19.4
  Top Layer w0.254: U2.37 130.659,89.313 130.659,90.018 130.828,90.188 130.828,96.121 129.667,97.282 129.667,99.441 134.366,104.14 J2.4
SWDIO: J2.2 U2.34 | length 21.1
  Top Layer w0.254: v1(126.619,91.44) 127.508,91.44 127.858,91.79 U2.34 ; v1(133.985,102.362) 135.636,104.013 J2.2
  Bottom Layer w0.254: v1(126.619,91.44) 133.985,98.806 v1(133.985,102.362)
"USART1 RX": P1.2 U2.31 | length 15.9
  Top Layer w0.254: P1.2 123.456,104.533 123.456,97.778 127.921,93.313 129.113,93.313 U2.31
"USART1 TX": P1.1 U2.30 | length 11.7
  Top Layer w0.254: P1.1 124.587,97.536 128.31,93.813 129.113,93.813 U2.30
pads on no net: FID1.1 FID2.1 J1.7 J1.NC J2.6 J2.7 J2.8 J6.NC K1.1 K1.5 M1.1 M2.1 M3.1 M4.1 U1.2 U1.6 U1.11 U2.2 U2.3 U2.4 U2.10 U2.11 U2.12 U2.13 U2.14 U2.15 U2.16 U2.17 U2.18 U2.20 U2.21 U2.22 U2.25 U2.26 U2.29 U2.38 U2.39 U2.40 U2.41 U2.42 U2.44

## Polygon pours and split planes (outlines as drawn)
no net on Bottom Overlay (solid): 99.695,90.551
GND on Top Layer "GND_L01_P010" (solid, pour order 10): 109.22,92.075 113.03,92.075 113.03,87.249 109.22,87.249
no net on Top Layer "NONET_L01_P009" (solid, pour order 9): 117.897,100.968
3V3 on Top Layer "3V3_L01_P008" (solid, pour order 8): 105.029,105.156 105.029,102.235 107.569,99.695 118.872,99.695 118.872,88.773 116.713,86.614 108.585,78.486 108.585,50.8 143.383,50.8 149.225,56.642 149.225,105.648 145.653,109.22 115.062,109.22 105.029,109.22
GND on Top Layer "GND_L01_P007" (solid, pour order 7): 117.983,95.631 112.776,95.631 112.776,92.837 111.506,91.567 111.506,87.249 115.443,87.249 117.983,89.789
no net on Top Layer "NONET_L01_P004" (solid, pour order 4): 120.904,98.171
"PWR SW" on Top Layer "PWR_SW_L01_P002" (solid, pour order 2): 108.966,98.552 115.189,98.552 115.189,95.885 114.935,95.631 112.014,95.631 112.014,93.218 105.41,93.218 105.41,95.504 106.807,95.504 106.807,94.996 108.966,94.996
no net on Top Layer "NONET_L01_P000" (solid, pour order 0): 109.093,98.933
GND on Bottom Layer "GND_L02_P006" (solid, pour order 6): 94.869,55.897 99.187,51 144.539,51 149.225,55.686 149.225,105.664 145.669,109 98.298,109 94.869,105.799

## Keep-outs
Bottom Layer:
  region: 105.283,104.902 115.951,104.902 115.951,86.614 101.473,86.614 101.473,101.473

## Silkscreen, mask and mechanical layers (free items; w line width, h text height)
Top Overlay:
  lines w0.254: 101.981,98.425 107.188,98.425 107.95,97.663 107.95,97.028 ; 103.632,104.648 103.632,102.489 104.648,101.473 ; 115.316,106.553 117.221,106.553 117.348,106.553 117.983,105.918 ; 120.65,109.474 120.904,109.728 126.111,109.728 126.111,103.886 126.238,103.759 127.635,103.759 128.27,103.759 128.651,103.378 128.905,103.124 ; 133.731,79.375 133.731,80.899 135.89,83.058 144.907,83.058 ; 143.256,101.092 143.256,101.6 144.272,102.616 147.828,102.616
Bottom Overlay:
  text "IMD - 2020" at 99.06,73.787 h1.52 r270
  text "QUTMS - SHDN" at 101.727,73.533 h1.52 r270
Mechanical 1:
  lines w0.254: 94.069,54.267 94.069,105.499 ; 94.069,55 ccw(c99.069,55) 99.069,50 ; 94.069,105 cw(c99.069,105) 99.069,110 ; 99.06,50 145.377,50 ; 99.06,110 145.796,110 ; 145,50 ccw(c145,55) 150,55 ; 145,110 cw(c145,105) 150,105 ; 149.987,105.791 150,54.623

## Text inside footprints (layer, text, board x,y; h text height)
K1: Top Overlay "G5V-1" at 127,61.467 h1.52 r270
U2: Top Overlay "STM32 / F042 / C6" at 135.731,96.256 h1.02 r180